# Altium PCB PCB3.PcbDoc
Units mm, origin at the board's own origin, x right, y up, seen from the top; angles counter-clockwise.
Board outline 67.69 x 63.63 mm, 2 copper layers (Top Layer, Bottom Layer); 10 components, 15 nets, 84 pads, 2 vias.
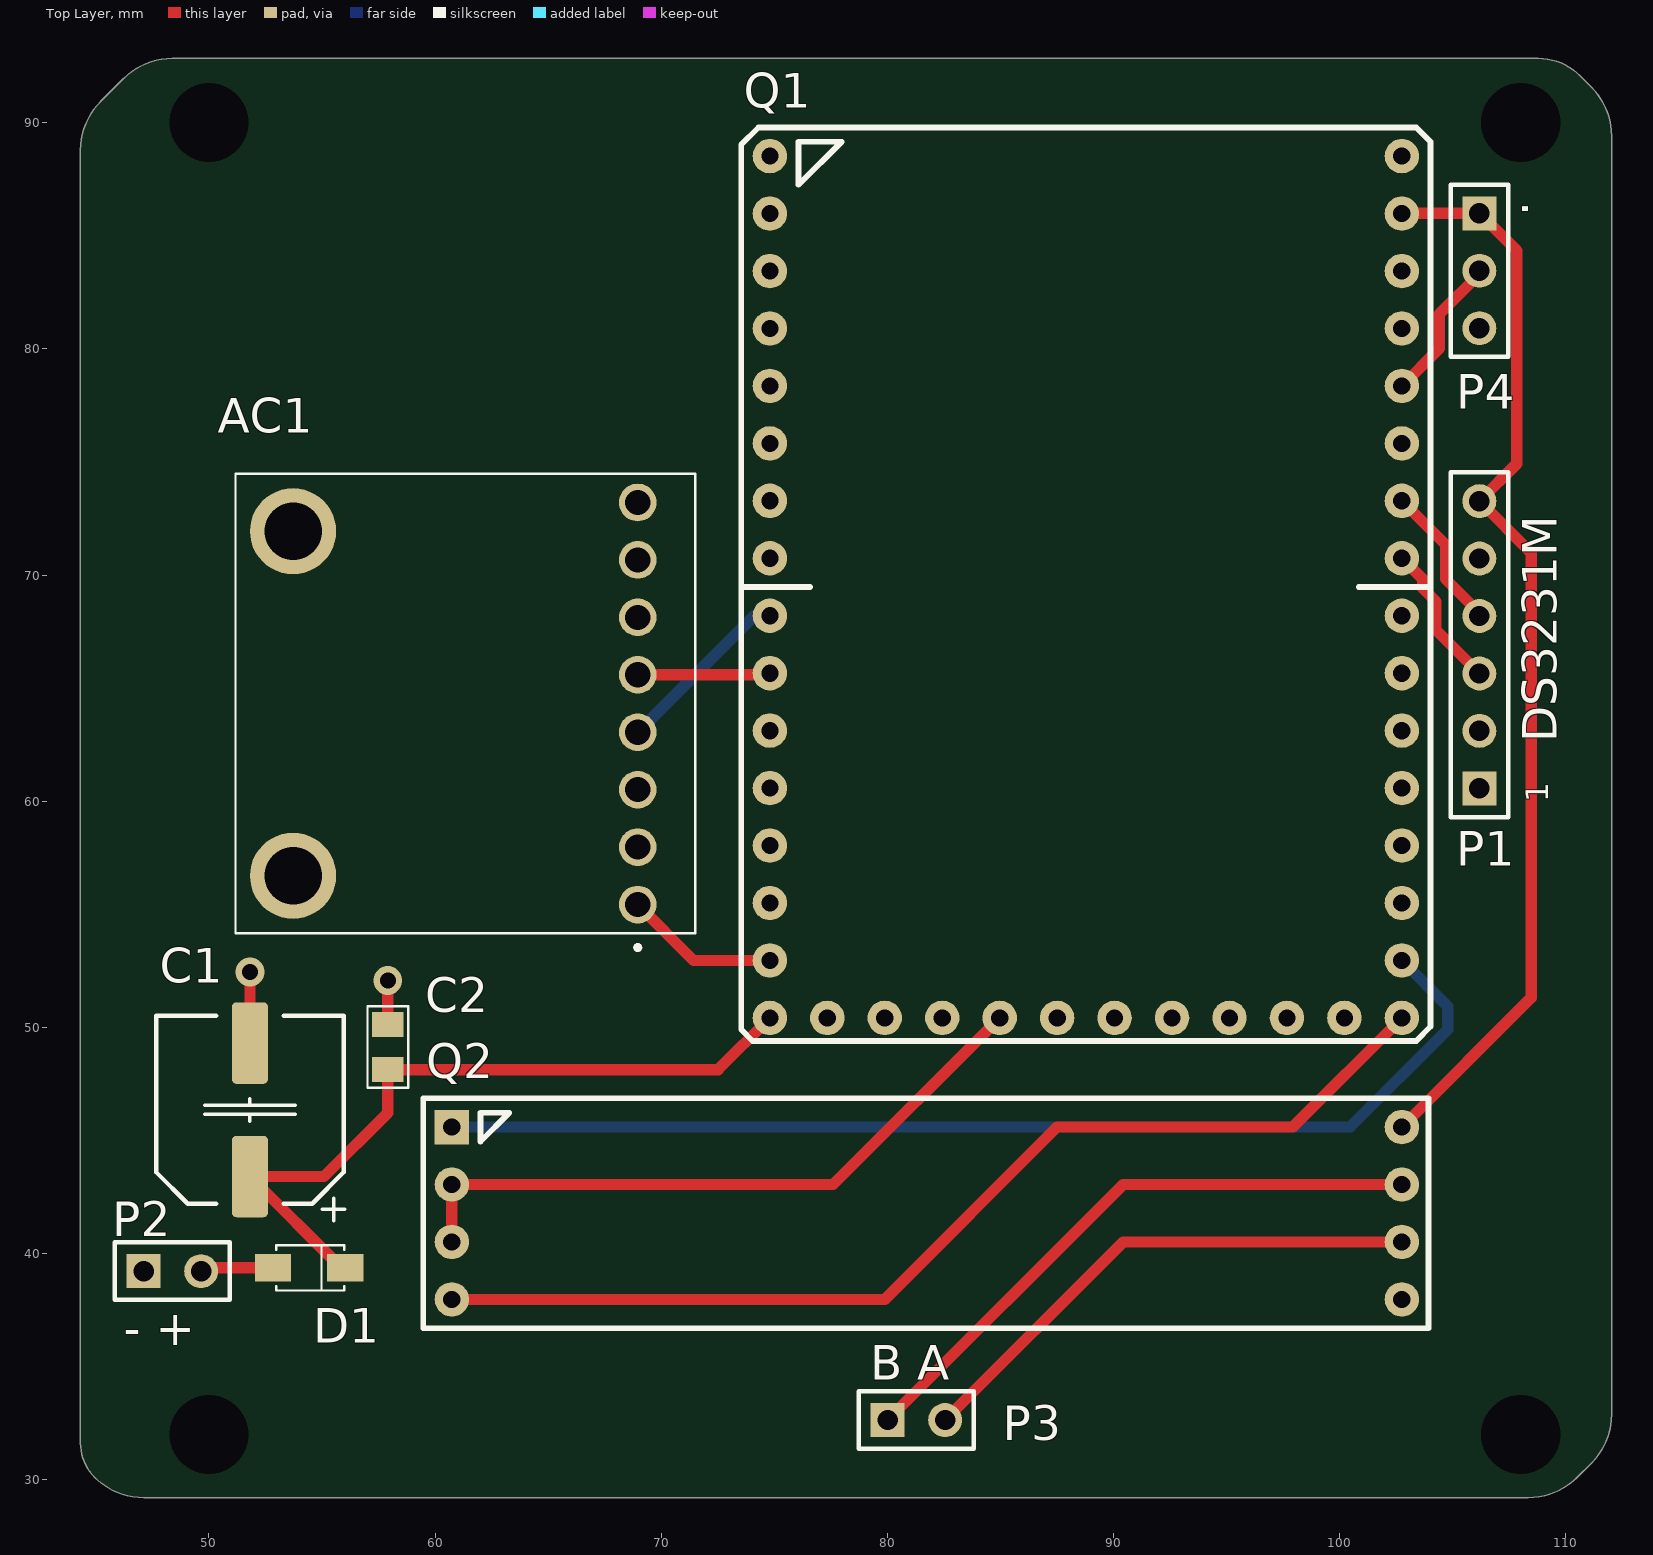
[diagram p0: Top Layer view]
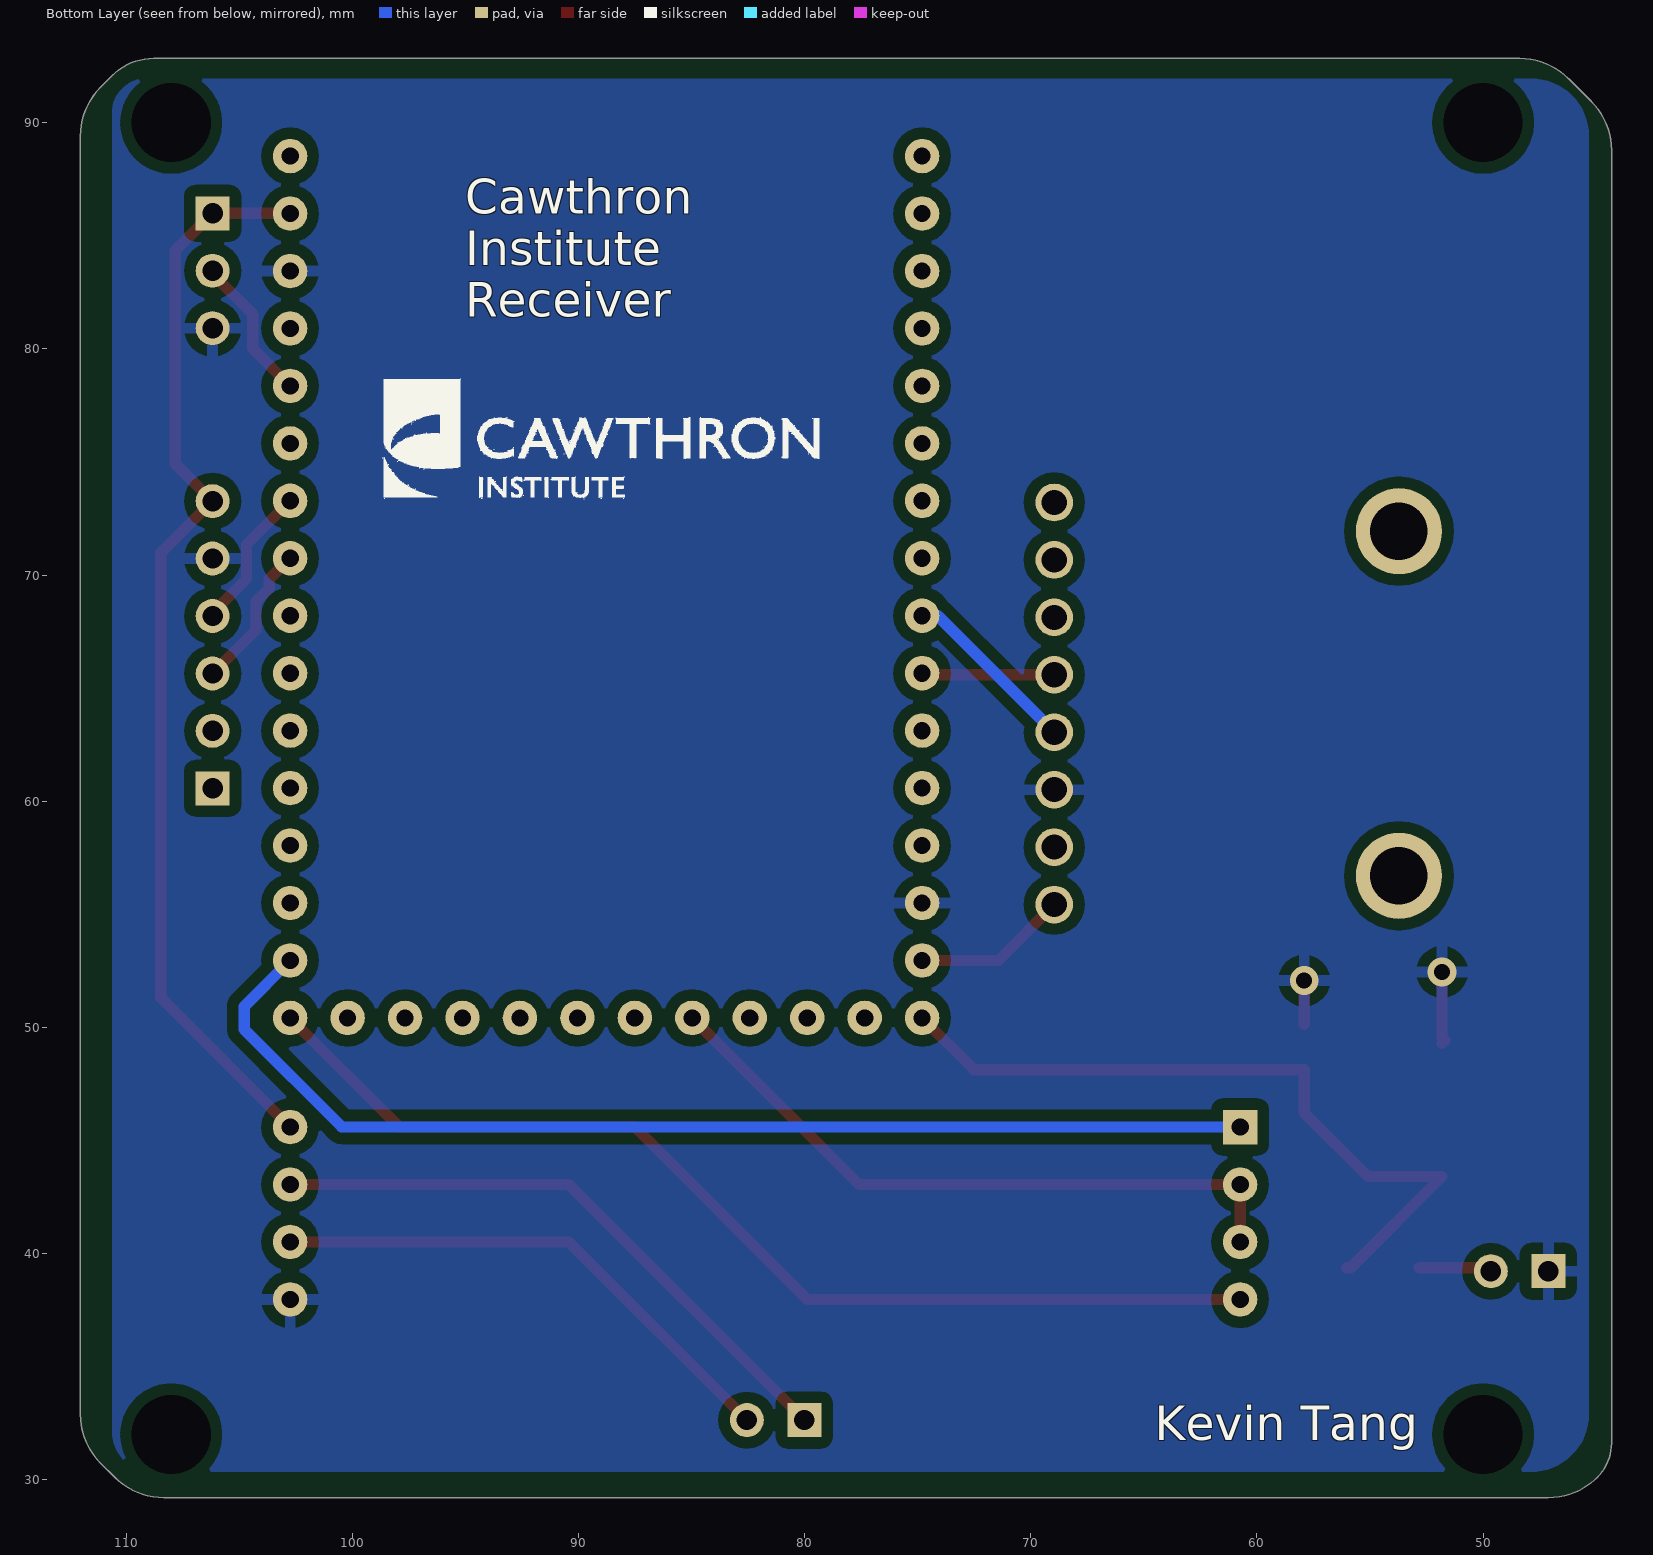
[diagram p1: Bottom Layer view, seen from below]

## Layer stack, top to bottom
Top Solder: solder mask 0.0102, Solder Resist, Dk 3.5
Top Layer: signal copper 0.0356
Dielectric 1: dielectric 0.32, FR-4, Dk 4.8
Bottom Layer: signal copper 0.0356
Bottom Solder: solder mask 0.0102, Solder Resist, Dk 3.5

## Board outline
44.949,30.108 ccw(c47.117,32.276) 47.117,29.21 108.331,29.21 ccw(c108.331,32.276) 110.499,30.108 111.116,30.725 ccw(c108.948,32.893) 112.014,32.893 112.014,89.408 ccw(c108.948,89.408) 111.116,91.576 110.617,92.075 ccw(c108.777,90.235) 108.777,92.837 48.387,92.837 ccw(c48.387,89.771) 46.219,91.939 45.221,90.941 ccw(c47.389,88.773) 44.323,88.773 44.323,31.619 ccw(c46.46,31.619)

## Design rules (kind name [scope] priority, off if disabled: settings)
Clearance [All] p1: gap=0.5 ignorepadtopadclearanceinfootprint=FALSE
HoleSize [All] p1: absolutevalues=TRUE maxlimit=6 minlimit=0.025 maxpercent=80.000 minpercent=20.000
PolygonConnect [All] p1: connectstyle=Relief reliefconductorwidth=0.5 reliefentries=4 polygonreliefangle="90 Angle" airgapwidth=0.5
RoutingVias [All] p1: holewidth=0.7 width=1.7 viastyle="Through Hole" minholewidth=0.6 minwidth=1.2 maxholewidth=1 maxwidth=2.2
SilkToSilkClearance [All] p1: silktosilkclearance=0.1
SilkToSolderMaskClearance [IsPad] p1: minsilkscreentomaskgap=0.1 clearancetoexposedcopper=TRUE
SolderMaskExpansion [All] p1: expansion=0.102
Width [All] p1: maxlimit=0.7 minlimit=0.5 preferedwidth=0.5
27 further rules are at their usual default settings.

## Components (designator, comment, footprint, x,y, rotation, side; value= is the part's Value field where it differs from the comment)
AC1 "2809" 2809 68.961,55.428 r90 top
C1 "CAP ALUM 22UF 20% 50V SMD" "CAP POL 8x5.4mm SMT" 51.816,46.355 r90 top
C2 "100nF" "0805 CAP" 57.912,49.133 r90 top
D1 "1N4148W-7-F" SOD123 54.483,39.37 r0 top
P1 "DS3231M" HDR1X6 106.172,60.567 r90 top
P2 "Battery" HDR1X2 47.117,39.22 r0 top
P3 "Header 2" HDR1X2 80.01,32.639 r0 top
P4 "TMP36" HDR1X3 106.172,85.991 r270 top
Q1 "PYBv1.1" PCBComponent_1#1 74.803,50.419 r0 top
Q2 "TTL to RS485" PCBComponent_1#2 60.743,37.973 r0 top

## Footprints (in the part's own frame and the unit in brackets; to place one, negate y for a bottom-side part, rotate by r counter-clockwise, add the part's x,y. Pads: shape width x height; smd on the part's side, far side on the other; paste and mask are expansions set on the pad)
"0805 CAP" [mm] "http://www.digikey.co.nz/Web%20Export/Supplier%20Content/Vishay_8026/PDF/VishayBeyschlag_SolderPad.pdf?redirected=1 with dimension G modified by +0.25mm"
  rect 1.1x1.4 smd: 1(-1,0) 2(1,0)
  silkscreen extent -1.8,-0.9 1.8,0.9, body extent -1.04,-0.66 1.04,0.66, height 0.61
2809 [mm]
  round 1.665 hole 1.11: 1(0,0) 2(2.54,0) 3(5.08,0) 4(7.62,0) 5(10.16,0) 6(12.7,0) 7(15.24,0) 8(17.78,0)
  round 3.81 hole 2.54: MH1(1.27,15.24) MH2(16.51,15.24)
  silkscreen extent -2,-2.54 19.05,17.78, body extent -1.27,-2.54 19.05,17.78, height 5
"CAP POL 8x5.4mm SMT" [mm]
  round 0.508 on Mech15: 0(0,0)
  rrect25% 3.6x1.6 smd: 1(-2.95,0) 2(2.95,0)
  silkscreen extent -4.9,-4.2 4.15,4.15, body extent -4.5,-4.15 4.5,4.15, height 5.4
HDR1X2 [mm] "Connector; Header; 2 Position"
  rect 1.5x1.5 hole 0.9: 1(0,0)
  round 1.5 hole 0.9: 2(2.54,0)
  silkscreen extent -1.27,-1.27 3.81,1.27
HDR1X3 [mm] "Connector; Header; 3 Position"
  rect 1.5x1.5 hole 0.9: 1(0,0)
  round 1.5 hole 0.9: 2(2.54,0) 3(5.08,0)
  silkscreen extent -1.27,-1.27 6.35,1.27
HDR1X6 [mm] "Connector; Header; 6 Position"
  rect 1.5x1.5 hole 0.9: 1(0,0)
  round 1.5 hole 0.9: 2(2.54,0) 3(5.08,0) 4(7.62,0) 5(10.16,0) 6(12.7,0)
  silkscreen extent -1.27,-1.27 13.97,1.27
PCBComponent_1#1 [mil]
  round 60 hole 30: 1(0,1500) 2(0,1400) 3(0,1300) 4(0,1200) 5(0,1100) 6(0,1000) 7(0,900) 8(0,800) 9(0,700) 10(0,600) 11(0,500) 12(0,400) 13(0,300) 14(0,200) 15(0,100) 16(0,0) 17(1100,1500) 18(1100,1400) 19(1100,1300) 20(1100,1200) 21(1100,1100) 22(1100,1000) 23(1100,900) 24(1100,800) 25(1100,700) 26(1100,600) 27(1100,500) 28(1100,400) 29(1100,300) 30(1100,200) 31(1100,100) 32(1100,0) 33(100,0) 34(200,0) 35(300,0) 36(400,0) 37(500,0) 38(600,0) 39(700,0) 40(800,0) 41(900,0) 42(1000,0)
  silkscreen extent -50,-40 1150,1550
PCBComponent_1#2 [mil]
  rect 60x60 hole 30: 1(0,300)
  round 60 hole 30: 2(0,200) 4(0,0) 5(1653.54,300) 6(1653.54,200) 7(1653.54,100) 8(1653.54,0)
  round 60 hole 30 mask+4: 3(0,100)
  silkscreen extent -50,-50 1700,350
SOD123 [mm] "SOD-123; 2 Leads; Body 2.7 x 1.6 mm, (LxW)"
  rect 1.6x1.2 smd: 1(-1.65,0) 2(1.55,0)
  silkscreen extent -1.5,-1 1.5,1, body extent -1.8,-0.86 1.8,0.86, height 1.21

## Part data
AC1: "Accelerometer", Manufacturer_Name=Adafruit, Mouser Part Number=485-2809, Allied_Number=70929317, Allied Price/Stock=https://www.alliedelec.com/adafruitindustries-2809/70929317/, Datasheet Link=http://www.mouser.com/datasheet/2/737/adafruit-lis3dh-triple-axis-accelerometer-breakout-780345.pdf, Height=5mm, Manufacturer_Part_Number=2809, Mouser Price/Stock=https://www.mouser.com/Search/Refine.aspx?Keyword=485-2809
C1: library part "SMT-CAP 22uF/35V SM", Capacitance 1="47 µF", ESR (Equivalent Series Resistance)=-, Lifetime @ Temp.="2000 Hrs @ 85°C", Manufacturer=Nichicon, Manufacturer Part Number=UWX1V220MCL1GB, Operating Temperature="-40°C ~ 85°C", Package / Case="Radial, Can - SMD", Supplier Part Number 1=493-2118-1-ND, Tolerance=±20%, Applications="General Purpose", Category=Capacitors, ComponentLink1Description=http://nichicon-us.com/english/products/pdfs/e-uwx.pdf, ComponentLink1URL=http://nichicon-us.com/english/products/pdfs/e-uwx.pdf, Height - Seated (Max)="0.213\" (5.40mm)", Lead Spacing=-, Mounting Type="Surface Mount", Packaging="Cut Tape (CT)", Part Status=Active, Polarization=Polar, Pricing 1="1=0.59, 10=0.406, 100=0.2304, 500=0.16268 (NZD)", Ratings=-, Revision="July-2002: Re-released for DXP Platform.", RoHS="RoHS Compliant", Size / Dimension="0.248\" Dia (6.30mm)", Stock 1=680, Supplier 1=Digi-Key, Surface Mount Land Size="0.260\" L x 0.260\" W (6.60mm x 6.60mm)"
C2: library part "SMT- Cap", "SMT Capacitor Non Polarised"
D1: library part "SMT-Diode 1N4148W-7-F", "DIODE GEN PURP 100V 300MA SOD123", Base Part Number=1N4148W, Capacitance @ Vr, F="2pF @ 0V, 1MHz", Current - Average Rectified (Io)=150mA, Manufacturer="Diodes Incorporated", Manufacturer Part Number=1N4148W-13-F, Operating Temperature - Junction="-65°C ~ 150°C", Package / Case=SOD-123, Supplier Part Number 1=1N4148W-13FDICT-ND, Category="Discrete Semiconductor Products", ComponentLink1Description=https://www.diodes.com/assets/Datasheets/ds30086.pdf, ComponentLink1URL=https://www.diodes.com/assets/Datasheets/ds30086.pdf, Diode Type=Standard, Mounting Type="Surface Mount", Packaging="Cut Tape (CT)", Part Status=Active, Pricing 1="1=0.33, 10=0.292, 100=0.1586, 500=0.0976, 1000=0.06656 (NZD)", RoHS="RoHS Compliant", Speed="Small Signal =< 200mA (Io), Any Speed", Stock 1=5282, Supplier 1=Digi-Key, Supplier Device Package=SOD-123
P1: library part "Header 6", "Header, 6-Pin", LatestRevisionDate=17-Jul-2002, LatestRevisionNote="Re-released for DXP Platform.", Publisher="Altium Limited"
P2: library part "Header 2", "Header, 2-Pin", LatestRevisionDate=17-Jul-2002, LatestRevisionNote="Re-released for DXP Platform.", Publisher="Altium Limited"
P3: "Header, 2-Pin", LatestRevisionDate=17-Jul-2002, LatestRevisionNote="Re-released for DXP Platform.", Publisher="Altium Limited"
P4: library part "Header 3", "Header, 3-Pin", LatestRevisionDate=17-Jul-2002, LatestRevisionNote="Re-released for DXP Platform.", Publisher="Altium Limited"
Q1: "Microcontroller"
Q2: "Converter"

## Free pads (board coordinates)
  round 1.524 hole 3.5: 1(50,32) 1(50,90) 1(108,32) 1(108,90)

## Via types
v1: diameter 1.27, hole 0.711, Top Layer to Bottom Layer, 2 vias

## Nets (pads, with @x,y where several pads share a name; then routed paths per layer and width w, separated by ;. In a path a pad name is that pad's centre, name@x,y a point inside that pad or via, vN(x,y) a via of type N, cw(c..) or ccw(c..) an arc to the next point about the centre after c; other vN are vias at no path point)
GND: AC1.3 C1.2 C2.2 P1.5 P2.1 P4.3 Q1.14 Q1.19 Q2.8 | length 5.2
  Top Layer w0.5: C1.2 51.689,49.432 51.816,49.559 v1(51.816,52.451) ; C2.2 v1(57.912,52.07)
NetAC1_1: AC1.1 Q1.15 | length 6.9
  Top Layer w0.5: AC1.1 71.43,52.959 Q1.15
NetAC1_4: AC1.4 Q1.9 | length 8
  Bottom Layer w0.5: AC1.4 74.112,68.199 Q1.9
NetAC1_5: AC1.5 Q1.10 | length 5.9
  Top Layer w0.5: AC1.5 74.732,65.588 Q1.10
NetC1_1: C1.1 C2.1 D1.2 Q1.16 | length 32.9
  Top Layer w0.5: D1.2 55.851,39.37 C1.1 55.089,43.405 57.912,46.228 C2.1 72.517,48.133 Q1.16
NetD1_1: D1.1 P2.2 | length 3.3
  Top Layer w0.5: P2.2 cw(c49.807,39.22) 49.807,39.37 D1.1
NetP1_3: P1.3 Q1.24 | length 6.5
  Top Layer w0.5: Q1.24 103.672,69.81 103.672,69.408 104.255,68.825 104.255,67.564 P1.3
NetP1_4: P1.4 Q1.23 | length 6.5
  Top Layer w0.5: Q1.23 104.672,71.35 104.672,69.822 106.172,68.322 P1.4
NetP1_6: P1.6 P4.1 Q1.18 Q2.5 | length 48.5
  Top Layer w0.5: Q2.5 108.458,51.308 108.458,70.981 P1.6 107.823,74.918 107.823,84.34 P4.1 102.755,85.991 Q1.18
NetP3_1: P3.1 Q2.6 | length 27
  Top Layer w0.5: P3.1 90.424,43.053 Q2.6
NetP3_2: P3.2 Q2.7 | length 23.5
  Top Layer w0.5: P3.2 90.424,40.513 Q2.7
NetP4_2: P4.2 Q1.21 | length 6.5
  Top Layer w0.5: Q1.21 104.394,80.01 104.394,81.534 106.172,83.312 P4.2
NetQ1_31: Q1.31 Q2.1 | length 49.7
  Bottom Layer w0.5: Q2.1 100.457,45.593 104.775,49.911 104.775,50.927 Q1.31
NetQ1_32: Q1.32 Q2.4 | length 47.2
  Top Layer w0.5: Q2.4 79.883,37.973 87.503,45.593 97.917,45.593 Q1.32
NetQ1_36: Q1.36 Q2.2 Q2.3 | length 29.8
  Top Layer w0.5: Q2.3 Q2.2 77.597,43.053 Q1.36
pads on no net: AC1.2 AC1.6 AC1.7 AC1.8 AC1.MH1 AC1.MH2 C1.0 P1.1 P1.2 Q1.1 Q1.2 Q1.3 Q1.4 Q1.5 Q1.6 Q1.7 Q1.8 Q1.11 Q1.12 Q1.13 Q1.17 Q1.20 Q1.22 Q1.25 Q1.26 Q1.27 Q1.28 Q1.29 Q1.30 Q1.33 Q1.34 Q1.35 Q1.37 Q1.38 Q1.39 Q1.40 Q1.41 Q1.42

## Polygon pours and split planes (outlines as drawn)
GND on Bottom Layer "GND Plane" (solid, pour order 0): 45.339,32.893 ccw(c47.879,32.893) 47.879,30.353 108.839,30.353 ccw(c108.839,32.131) 110.617,32.131 110.617,90.424 ccw(c109.093,90.424) 109.093,91.948 47.879,91.948 ccw(c47.879,89.408) 45.339,89.408

## Silkscreen, mask and mechanical layers (free items; w line width, h text height)
Top Overlay:
  text "." at 108.331,85.852 h1.52 r90
  text "DS3231M" at 109.601,62.611 h1.52 r90
  text "1" at 109.22,59.944 h1 r90
  text "- +" at 46.228,35.941 h1.52
  text "B A" at 79.248,34.417 h1.52
Bottom Overlay:
  drawing of 1887 lines, arcs and shapes, not listed
  text "Cawthron / Institute / Receiver" at 94.996,81.407 h1.52
  text "Kevin Tang" at 64.516,31.75 h1.52
Mechanical 1:
  lines w0.254: 44.323,31.619 ccw(c46.46,31.619) 44.949,30.108 ccw(c47.117,32.276) 47.117,29.21 108.331,29.21 ccw(c108.331,32.276) 110.499,30.108 111.116,30.725 ccw(c108.948,32.893) 112.014,32.893 112.014,89.408 ccw(c108.948,89.408) 111.116,91.576 110.617,92.075 ccw(c108.777,90.235) 108.777,92.837 88.011,92.837 48.387,92.837 ccw(c48.387,89.771) 46.219,91.939 45.221,90.941 ccw(c47.389,88.773) 44.323,88.773 44.323,31.619